# EAGLE board um3567 (EAGLE 6.4)
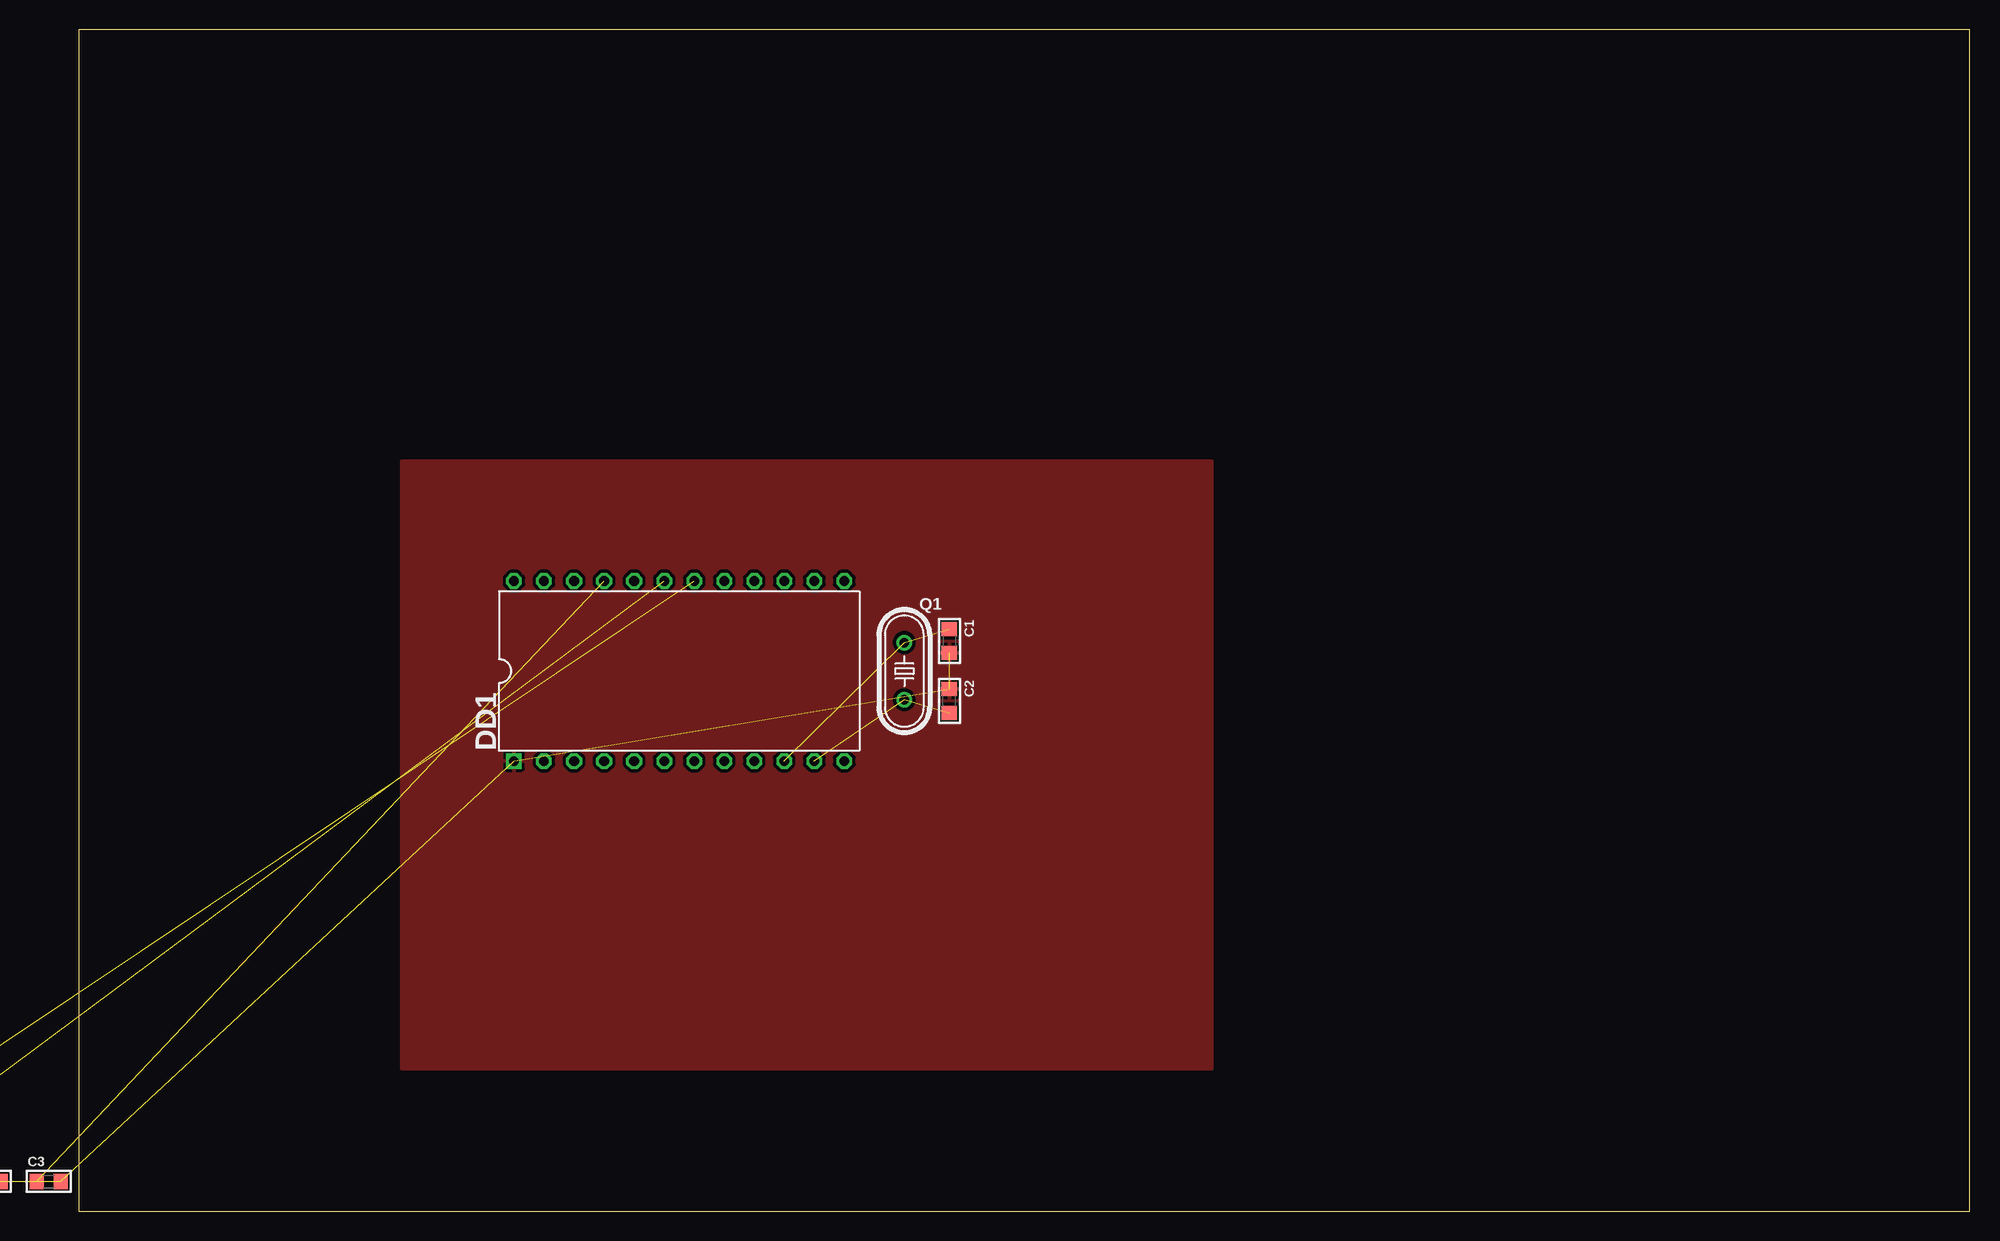
[diagram p0: board, top side]

Size 160 x 100 mm. Coordinates in mm from the lower left corner, seen from the top.
Outline: 0,0 160,0 160,100 0,100 0,0
Copper layers (1*16): Top 0.035mm / dielectric 1.5mm / Bottom 0.035mm
Design rules "default": minimum track width 10mil, minimum drill 24mil, track to track 8mil, track to pad 8mil, pad to pad 8mil, via to via 8mil, smd to smd 8mil, copper to edge 40mil, drill to drill 8mil, minimum pad ring 10mil, minimum via ring 8mil, stop-mask expansion 4mil, vias tented up to drill 0mil, thermal gap 10mil

## Footprints (pad centres in the part's own frame; a part is rotated, then mirrored left to right if it is on the bottom)
C0805 = smd 1.2 x 1.3: 1 -1.016,0; 2 1.016,0
SMC_A = smd 1.6 x 1.4: + -1.5,0; - 1.5,0
SO08 = smd 0.66 x 2.032: 1 -1.905,-3.073; 2 -0.635,-3.073; 3 0.635,-3.073; 4 1.905,-3.073; 5 1.905,3.073; 6 0.635,3.073; 7 -0.635,3.073; 8 -1.905,3.073
DIL24 = drill 0.813 square: 1 -13.97,-7.62 | drill 0.813 octagon: 2 -11.43,-7.62; 3 -8.89,-7.62; 4 -6.35,-7.62; 5 -3.81,-7.62; 6 -1.27,-7.62; 7 1.27,-7.62; 8 3.81,-7.62; 9 6.35,-7.62; 10 8.89,-7.62; 11 11.43,-7.62; 12 13.97,-7.62; 13 13.97,7.62; 14 11.43,7.62; 15 8.89,7.62; 16 6.35,7.62; 17 3.81,7.62; 18 1.27,7.62; 19 -1.27,7.62; 20 -3.81,7.62; 21 -6.35,7.62; 22 -8.89,7.62; 23 -11.43,7.62; 24 -13.97,7.62
HC49/S = drill 0.8: 1 -2.413,0; 2 2.413,0
R0805 = smd 1.2 x 1.3: 1 -1.016,0; 2 1.016,0
RTRIM-3362P = drill 0.8: 1 -2.54,0; 2 0,2.54; 3 2.54,0
DG350-3.5-02P = drill 1 long: 1 -1.75,0; 2 1.75,0

## Placement (x,y rotation side)
C1  30pF  [C0805]  73.66,48.26 270 top
C2  30pF  [C0805]  73.66,43.18 90 top
C3  0.1  [C0805]  -2.54,2.54 0 top
C4  0.1  [C0805]  -7.62,2.54 0 top  (outside the outline)
C5  0.1  [C0805]  -12.7,2.54 0 top  (outside the outline)
C6  1uF  [SMC_A]  -22.23,-2.54 0 top  (outside the outline)
C7  1uF  [SMC_A]  -22.23,-7.62 0 top  (outside the outline)
C8  10n  [C0805]  -38.1,-7.62 0 top  (outside the outline)
C9  10uF  [SMC_A]  -37.47,-12.7 0 top  (outside the outline)
C10  1uF  [SMC_A]  -46.99,-17.78 0 top  (outside the outline)
C11  1uF  [SMC_A]  -56.52,-30.48 0 top  (outside the outline)
DA1  LM4871MX  [SO08]  -45.09,-10.79 0 top  (outside the outline)
DD1  UM3567  [DIL24]  50.8,45.72 0 top
Q1  3.579545 MHz  [HC49/S]  69.85,45.72 270 top
R1  4.7K  [R0805]  -17.78,2.54 0 top  (outside the outline)
R2  4.7K  [R0805]  -22.86,2.54 0 top  (outside the outline)
R3  22K  [R0805]  -27.94,-7.62 0 top  (outside the outline)
R4  22K  [R0805]  -33.02,-7.62 0 top  (outside the outline)
R5  20K  [R0805]  -52.07,-17.78 0 top  (outside the outline)
R6  20K  [R0805]  -57.15,-17.78 0 top  (outside the outline)
R7  100K  [RTRIM-3362P]  -53.98,-24.13 0 top  (outside the outline)
X1  DG3XX-02-3.5  [DG350-3.5-02P]  -53.34,-38.73 0 top  (outside the outline)

## Library data of the parts
C1-C11 R1-R6 = rc-master-smd
DA1 = power_amp
DD1 = oldschool
Q1 = crystal
R7 = lcd-char
X1 = degson

## Nets
GND: C1.2 C2.2 C3.2 C4.2 C5.2 C8.2 C10.- C11.- DA1.7 DD1.1 R3.1 R7.3
N$1: C1.1 DD1.10 Q1.1
N$2: C2.1 DD1.11 Q1.2
N$3: DD1.19 R1.1
N$4: DD1.18 R2.1
N$5: C6.- C7.+ R2.2
N$6: C6.+ R1.2
N$7: C7.- R3.2 R4.1
N$8: C8.1 C9.+ R4.2
N$9: C10.+ DA1.6
N$10: DA1.4 R5.1 R6.2
N$11: DA1.5 R5.2 X1.1
N$12: C9.- R7.1
N$13: R6.1 R7.2
N$14: C11.+ DA1.2 DA1.3
N$15: DA1.8 X1.2
VCC: C3.1 C4.1 C5.1 DD1.21

## Tracks (layer width: path | path; a pad name or v marks a point on that pad's centre or on a via)
GND  (11 unrouted)
  pour Top (isolate 0.305, rank 4): 27.3,63.5 95.89,63.5 95.89,12.06 27.3,12.06
N$1  (2 unrouted)
N$2  (2 unrouted)
N$3  (1 unrouted)
N$4  (1 unrouted)
N$5  (2 unrouted)
N$6  (1 unrouted)
N$7  (2 unrouted)
N$8  (2 unrouted)
N$9  (1 unrouted)
N$10  (2 unrouted)
N$11  (2 unrouted)
N$12  (1 unrouted)
N$13  (1 unrouted)
N$14  (2 unrouted)
N$15  (1 unrouted)
VCC  (3 unrouted)